# EAGLE board Sensor Board A (EAGLE 8.4.1)
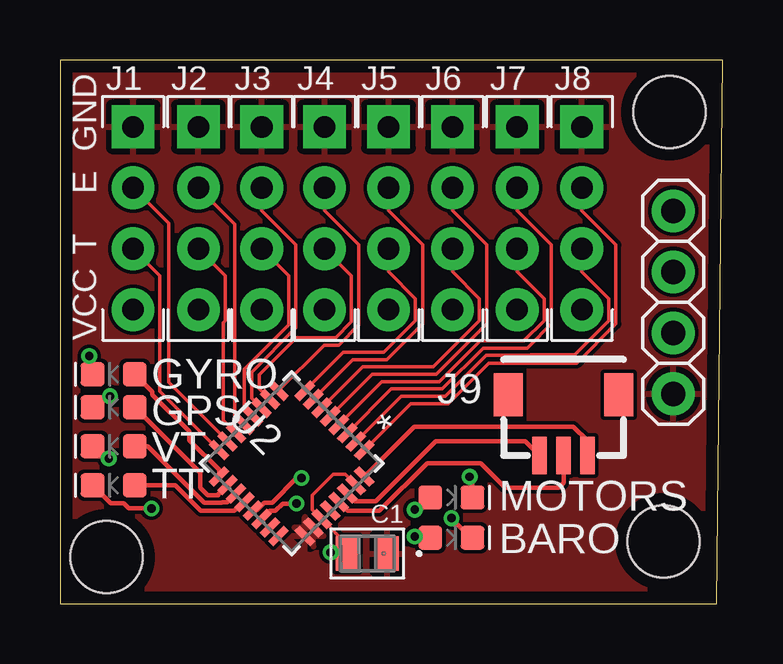
[diagram p0: board, top side]
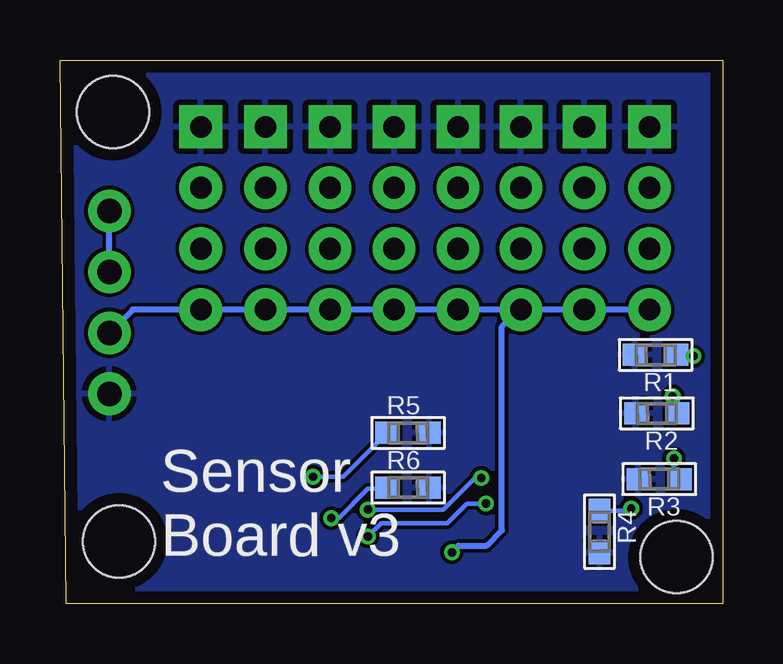
[diagram p1: board, bottom side, seen from below]

Size 27.61 x 22.65 mm. Coordinates in mm from the lower left corner, seen from the top.
Outline: 0,0 27.36,0 27.61,22.65 0,22.65 0,0
Copper layers (1*16): Top 0.035mm / dielectric 1.6mm / Bottom 0.035mm
Design rules "Elecrow_2-layer_PCB_eagle_rule": minimum track width 6mil, minimum drill 12mil, track to track 6mil, track to pad 6mil, pad to pad 6mil, via to via 8mil, smd to smd 0mil, copper to edge 20mil, drill to drill 10mil, minimum pad ring 6mil, minimum via ring 6mil, stop-mask expansion 0mil, vias tented up to drill 100mil, thermal gap 10mil
Holes 3 mm at 25.15,2.59 25.4,20.47 1.93,1.93

## Footprints (pad centres in the part's own frame; a part is rotated, then mirrored left to right if it is on the bottom)
0805 = smd 0.965 x 1.448: 1 -0.826,0; 2 0.826,0
LED-0603 = smd 1 x 1: A -0.877,0; C 0.877,0
HC-SR04_FOOTPRINT = drill 0.9 pad 1.778: ECHO 0,1.27; TRIG 0,-1.27; VCC 0,-3.81 | drill 0.9 pad 1.778 square: GND 0,3.81
JST_SH_3POS = smd 0.6 x 1.55: 1 -1.61,-0.08; 2 -0.61,-0.08; 3 0.39,-0.08 | smd 1.2 x 1.8: P$5 -2.91,2.445; P$6 1.69,2.445
1X04 = drill 1.016 pad 1.778: 1 -3.81,0; 2 -1.27,0; 3 1.27,0; 4 3.81,0
RC0603N-M = smd 0.965 x 0.914: 1 -0.876,0; 2 0.876,0
RGJ32-M = smd 0.305 x 0.914: 1 1.75,2.527; 2 1.25,2.527; 3 0.75,2.527; 4 0.25,2.527; 5 -0.25,2.527; 6 -0.75,2.527; 7 -1.25,2.527; 8 -1.75,2.527; 17 -1.75,-2.527; 18 -1.25,-2.527; 19 -0.75,-2.527; 20 -0.25,-2.527; 21 0.25,-2.527; 22 0.75,-2.527; 23 1.25,-2.527; 24 1.75,-2.527 | smd 0.914 x 0.305: 9 -2.527,1.75; 10 -2.527,1.25; 11 -2.527,0.75; 12 -2.527,0.25; 13 -2.527,-0.25; 14 -2.527,-0.75; 15 -2.527,-1.25; 16 -2.527,-1.75; 25 2.527,-1.75; 26 2.527,-1.25; 27 2.527,-0.75; 28 2.527,-0.25; 29 2.527,0.25; 30 2.527,0.75; 31 2.527,1.25; 32 2.527,1.75

## Placement (x,y rotation side)
C1  0.1uF  [0805]  12.8,2.08 180 top
D1  [LED-0603]  2.24,9.55 180 top
D2  [LED-0603]  2.24,8.18 180 top
D3  [LED-0603]  2.24,6.55 180 top
D4  [LED-0603]  2.24,4.93 180 top
D5  [LED-0603]  16.31,4.42 0 top
D6  [LED-0603]  16.31,2.74 0 top
J1  HC-SR04  [HC-SR04_FOOTPRINT]  3.05,16.05 0 top
J2  HC-SR04  [HC-SR04_FOOTPRINT]  5.77,16.05 0 top
J3  HC-SR04  [HC-SR04_FOOTPRINT]  8.41,16.05 0 top
J4  HC-SR04  [HC-SR04_FOOTPRINT]  11.02,16.05 0 top
J5  HC-SR04  [HC-SR04_FOOTPRINT]  13.69,16.05 0 top
J6  HC-SR04  [HC-SR04_FOOTPRINT]  16.36,16.05 0 top
J7  HC-SR04  [HC-SR04_FOOTPRINT]  19.05,16.05 0 top
J8  HC-SR04  [HC-SR04_FOOTPRINT]  21.74,16.05 0 top
J9  [JST_SH_3POS]  21.59,6.25 0 top
JP1  [1X04]  25.55,12.55 270 top
R1  1k  [RC0603N-M]  2.79,10.36 180 bottom
R2  1k  [RC0603N-M]  2.74,7.92 180 bottom
R3  1k  [RC0603N-M]  2.64,5.18 180 bottom
R4  1k  [RC0603N-M]  5.13,3 270 bottom
R5  1k  [RC0603N-M]  13.11,7.11 0 bottom
R6  1k  [RC0603N-M]  13.11,4.83 0 bottom
U2  TCA6424ARGJRRGJ32-M  [RGJ32-M]  9.65,5.84 315 top

## Library data of the parts
C1 = 0.1uF X7R Ceramic Capacitor; COPYRIGHT: Copyright C 2015 Accelerated Designs. All rights reserved; MANUFACTURER_PART_NUMBER: 08055C104KAT2A; VENDOR: Vendor
D1-D6 = SparkFun-LED
J1-J8 = Ultrasonic Sensor HC-SR04
J9 = thanics_robotics
JP1 = pinhead
R1-R6 = 1k-resistor; CASE: 0603 1608 metric; COMPOSITION: Thick Film; COPYRIGHT: Copyright C 2015 Accelerated Designs. All rights reserved; DATASHEET: httpwww.yageo.comdocumentsrecentPYuRC0603_51_RoHS_L_4.pdf; DESCRIPTION: RES 1.0K OHM 110W 5% 0603 SMD; DIGIKEYPARTNUMBER: 3111.0KGRTRND; HEIGHT: 0.022" 0.55mm; LEADSTYLE: Surface Mount SMD SMT; MANUFACTURER_PART_NUMBER: RC0603JR071KL; NEWARKPARTNUMBER: 14M7231; NUMBEROFTERMINATIONS: 2; PACKAGECASE: 0603 1608 Metric; PACKAGING: Tape &amp Reel TR; POWERWATTS: 0.1W 110W; QUANTITY_AVAILABLE: 0; RESISTANCEINOHMS: 1.00K; RESISTANCEOHMS: 1K; SIZEDIMENSION: 0.063" L x 0.031" W 1.60mm x 0.80mm; TEMPERATURECOEFFICIENT: 100ppm°C; TOLERANCE: 5%; VENDOR: Yageo; VOLTAGEWORKING: 50V
U2 = TCA6424-expander; MANUFACTURER_PART_NUMBER: TCA6424ARGJR; VENDOR: Texas Instruments

## Nets
+5V: C1.2 J1.VCC J2.VCC J3.VCC J4.VCC J5.VCC J6.VCC J7.VCC J8.VCC JP1.3 U2.27 U2.31
ECHO1: J1.ECHO U2.15
ECHO2: J2.ECHO U2.13
ECHO3: J3.ECHO U2.11
ECHO4: J4.ECHO U2.9
ECHO5: J5.ECHO U2.7
ECHO6: J6.ECHO U2.5
ECHO7: J7.ECHO U2.3
ECHO8: J8.ECHO U2.1
GND: C1.1 J1.GND J2.GND J3.GND J4.GND J5.GND J6.GND J7.GND J8.GND JP1.4 R1.2 R2.2 R3.2 R4.2 R5.2 R6.2 U2.25 U2.26
INT: J9.3 U2.32
N$1: JP1.1 JP1.2
N$2: D1.A U2.17
N$3: D2.A U2.18
N$4: D3.A U2.19
N$5: D4.A U2.20
N$6: D5.A U2.21
N$7: D6.A U2.22
N$8: D6.C R6.1
N$9: D5.C R5.1
N$10: D4.C R4.1
N$11: D3.C R3.1
N$12: D2.C R2.1
N$13: D1.C R1.1
SCL: J9.2 U2.29
SDA: J9.1 U2.30
TRIG1: J1.TRIG U2.16
TRIG2: J2.TRIG U2.14
TRIG3: J3.TRIG U2.12
TRIG4: J4.TRIG U2.10
TRIG5: J5.TRIG U2.8
TRIG6: J6.TRIG U2.6
TRIG7: J7.TRIG U2.4
TRIG8: J8.TRIG U2.2

## Tracks (layer width: path | path; a pad name or v marks a point on that pad's centre or on a via)
+5V  (via drill 0.35)
  Top 0.152: U2.31 11.88,5.38 11.38,5.38 10.52,4.52 10.52,3.91 U2.27 11.98,2.46 C1.2 11.33,2.08 v11.28,2.13
  Bottom 0.254: J1.VCC J2.VCC J3.VCC 8.48,12.24 | 8.48,12.24 J4.VCC J5.VCC J6.VCC J7.VCC J8.VCC 24.59,12.24 JP1.3 | v11.28,2.13 11,2.41 9.83,2.41 9.2,3.05 9.2,11.53 8.48,12.24
ECHO1
  Top 0.152: U2.15 6.98,6.76 4.52,9.22 4.52,15.85 J1.ECHO
ECHO2
  Top 0.152: J2.ECHO 7.29,15.8 7.29,7.85 U2.13
ECHO3
  Top 0.152: U2.11 7.99,8.56 7.99,9.64 9.83,11.48 9.83,14.94 8.41,16.36 J3.ECHO
ECHO4
  Top 0.152: U2.9 11.01,10.77 11.61,10.77 12.45,11.61 12.45,14.94 11.02,16.36 J4.ECHO
ECHO5
  Top 0.152: U2.7 12.2,10.16 13.62,10.16 15.11,11.65 15.11,14.94 13.69,16.36 J5.ECHO
ECHO6
  Top 0.152: U2.5 13.01,9.55 15.68,9.55 17.78,11.65 17.78,14.94 16.36,16.36 J6.ECHO
ECHO7
  Top 0.152: U2.3 13.81,8.94 15.93,8.94 17.63,10.64 19.46,10.64 19.55,10.73 | J7.ECHO 19.05,16.36 20.47,14.94 20.47,11.65 19.55,10.73 | 19.55,10.73
ECHO8
  Top 0.152: U2.1 14.62,8.33 16.18,8.33 17.87,10.02 21.53,10.02 23.16,11.65 23.16,14.94 21.74,16.36 J8.ECHO
GND
  pour Top: 0.36,22.66 27.69,22.66 27.33,-0.05 0,-0.05
  pour Bottom: -0.05,22.66 27.58,22.61 27.28,-0.1 0,-0.1
INT
  Top 0.178: J9.3 21.98,6.77 21.39,7.37 14.75,7.37 U2.32
N$1
  Bottom 0.254: JP1.2 JP1.1
N$2
  Top 0.178: D1.A 3.85,8.81 3.85,8.71 5.38,7.17 5.38,6.81 6.63,5.56 U2.17
N$3
  Top 0.178: D2.A 5.84,5.45 5.84,4.83 6.15,4.52 6.6,4.52 6.6,4.56 U2.18
N$4
  Top 0.178: D3.A 3.65,6.55 6.01,4.19 6.74,4.19 6.77,4.22 6.96,4.22 U2.19
N$5
  Top 0.178: D4.A 4.81,4.93 5.87,3.86 7.26,3.86 7.63,4.23 U2.20
N$6  (via drill 0.35)
  Top 0.178: U2.21 8.19,3.88 8.51,4.2 8.84,4.2 9.88,5.23 v10.06,5.23 | v14.78,3.91 14.92,3.91 D5.A
  Bottom 0.178: v14.78,3.91 11.63,3.91 10.31,5.23 v10.06,5.23
N$7  (via drill 0.35)
  Top 0.178: U2.22 8.74,3.87 8.98,3.87 9.28,4.17 v9.86,4.17 | v14.78,2.79 15.38,2.79 D6.A
  Bottom 0.178: v9.86,4.17 10.67,4.17 11.48,3.35 14.22,3.35 v14.78,2.79
N$8  (via drill 0.35)
  Top 0.178: D6.C 17.12,2.74 v16.31,3.56
  Bottom 0.178: v16.31,3.56 16,3.56 14.78,4.77 14.03,4.77 R6.1
N$9  (via drill 0.35)
  Top 0.178: D5.C 17.18,5.17 v17.07,5.28
  Bottom 0.178: v17.07,5.28 15.81,5.28 R5.1
N$10  (via drill 0.35)
  Top 0.178: v3.81,3.96 2.86,3.96 2.65,4.18 2.11,4.18 D4.C
  Bottom 0.178: R4.1 3.9,3.87 v3.81,3.96
N$11  (via drill 0.35)
  Top 0.178: v2.03,6.04 1.52,6.55 D3.C
  Bottom 0.178: R3.1 2.03,5.45 v2.03,6.04
N$12  (via drill 0.35)
  Top 0.178: D2.C 1.81,8.64 v2.08,8.64
  Bottom 0.178: v2.08,8.64 1.87,8.42 R2.1
N$13  (via drill 0.35)
  Top 0.178: v1.22,10.31 1.36,10.17 D1.C
  Bottom 0.178: R1.1 1.87,10.31 v1.22,10.31
SCL
  Top 0.178: J9.2 20.98,5.03 20.78,4.83 18.54,4.83 17.53,5.84 17.32,5.84 17.3,5.85 15.3,5.85 13.31,3.86 11.99,3.86 U2.29
SDA
  Top 0.178: U2.30 12.29,4.27 13.16,4.27 15.65,6.76 19.38,6.76 19.96,6.17 J9.1
TRIG1
  Top 0.152: U2.16 6.61,6.39 4.17,8.84 4.17,13.66 J1.TRIG
TRIG2
  Top 0.152: J2.TRIG 6.88,13.66 6.88,11.78 6.81,11.7 6.81,7.63 U2.14
TRIG3
  Top 0.152: U2.12 7.69,8.16 7.69,9.77 9.53,11.61 9.53,13.66 J3.TRIG
TRIG4
  Top 0.152: U2.10 8.3,8.96 8.3,9.53 9.85,11.07 11.48,11.07 12.14,11.73 12.14,13.66 J4.TRIG
TRIG5
  Top 0.152: U2.8 11.8,10.46 13.49,10.46 14.81,11.78 14.81,12.71 13.69,13.82 J5.TRIG
TRIG6
  Top 0.152: U2.6 12.61,9.85 15.55,9.85 17.48,11.78 17.48,12.71 16.36,13.82 J6.TRIG
TRIG7
  Top 0.152: U2.4 13.41,9.25 15.8,9.25 17.5,10.94 19.33,10.94 20.17,11.78 20.17,12.71 19.05,13.82 J7.TRIG
TRIG8
  Top 0.152: U2.2 14.21,8.64 16.06,8.64 17.76,10.33 19.59,10.33 19.61,10.36 21.44,10.36 22.86,11.78 22.86,12.71 21.74,13.82 J8.TRIG

## Text on the board
tPlace: GND | E | T | VCC | GYRO | J9 | GPS | VT | TT | MOTORS | BARO
bNames: Sensor / Board v3